# Altium PCB PCB5.pcbdoc
Units mil, origin at the board's own origin, x right, y up, seen from the top; angles counter-clockwise.
Board outline 4640 x 4130.45 mil, 2 copper layers (Top Layer, Bottom Layer); 22 components, 48 nets, 149 pads, 54 vias.
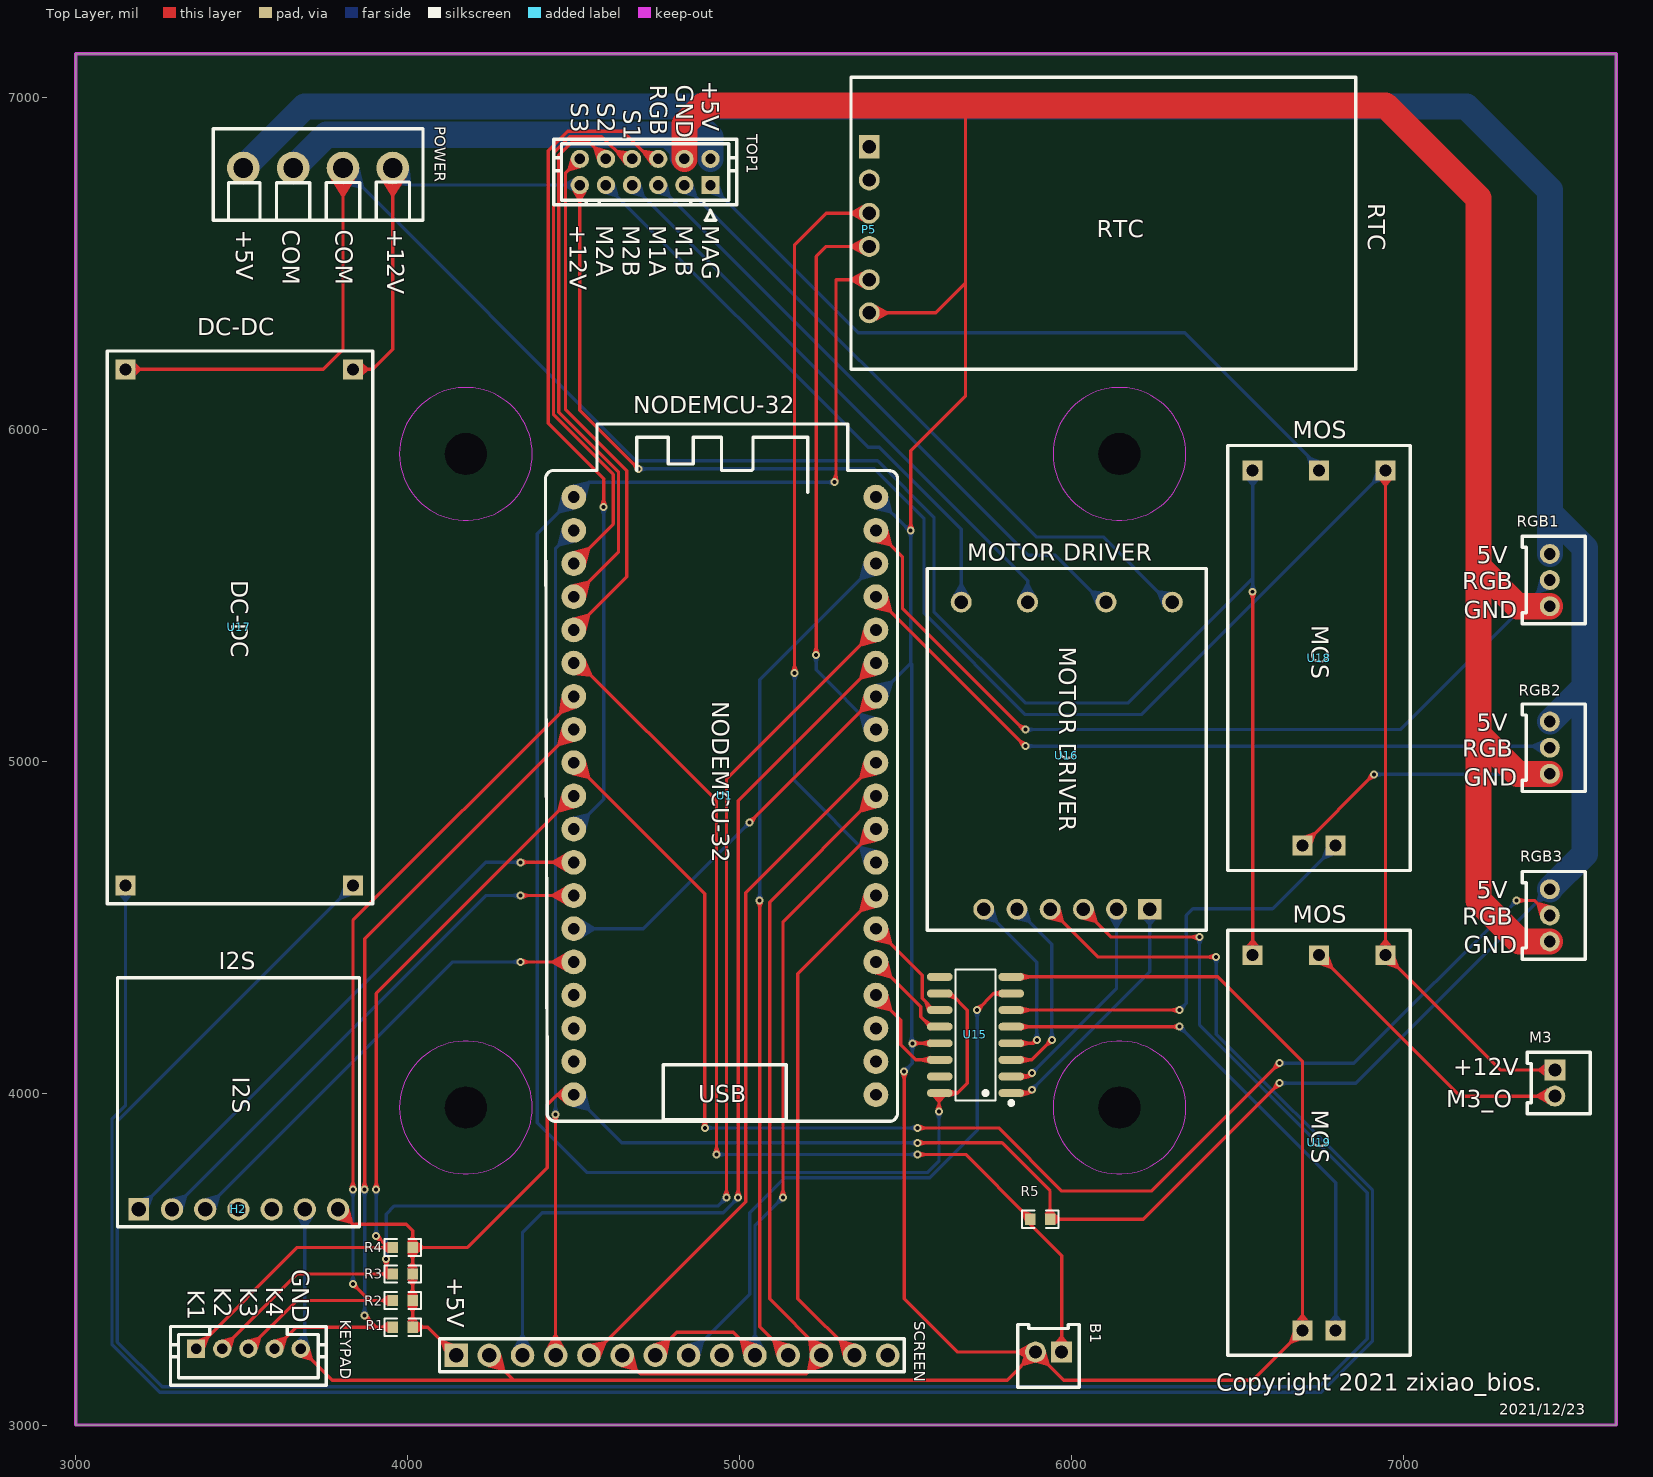
[diagram p0: Top Layer view]
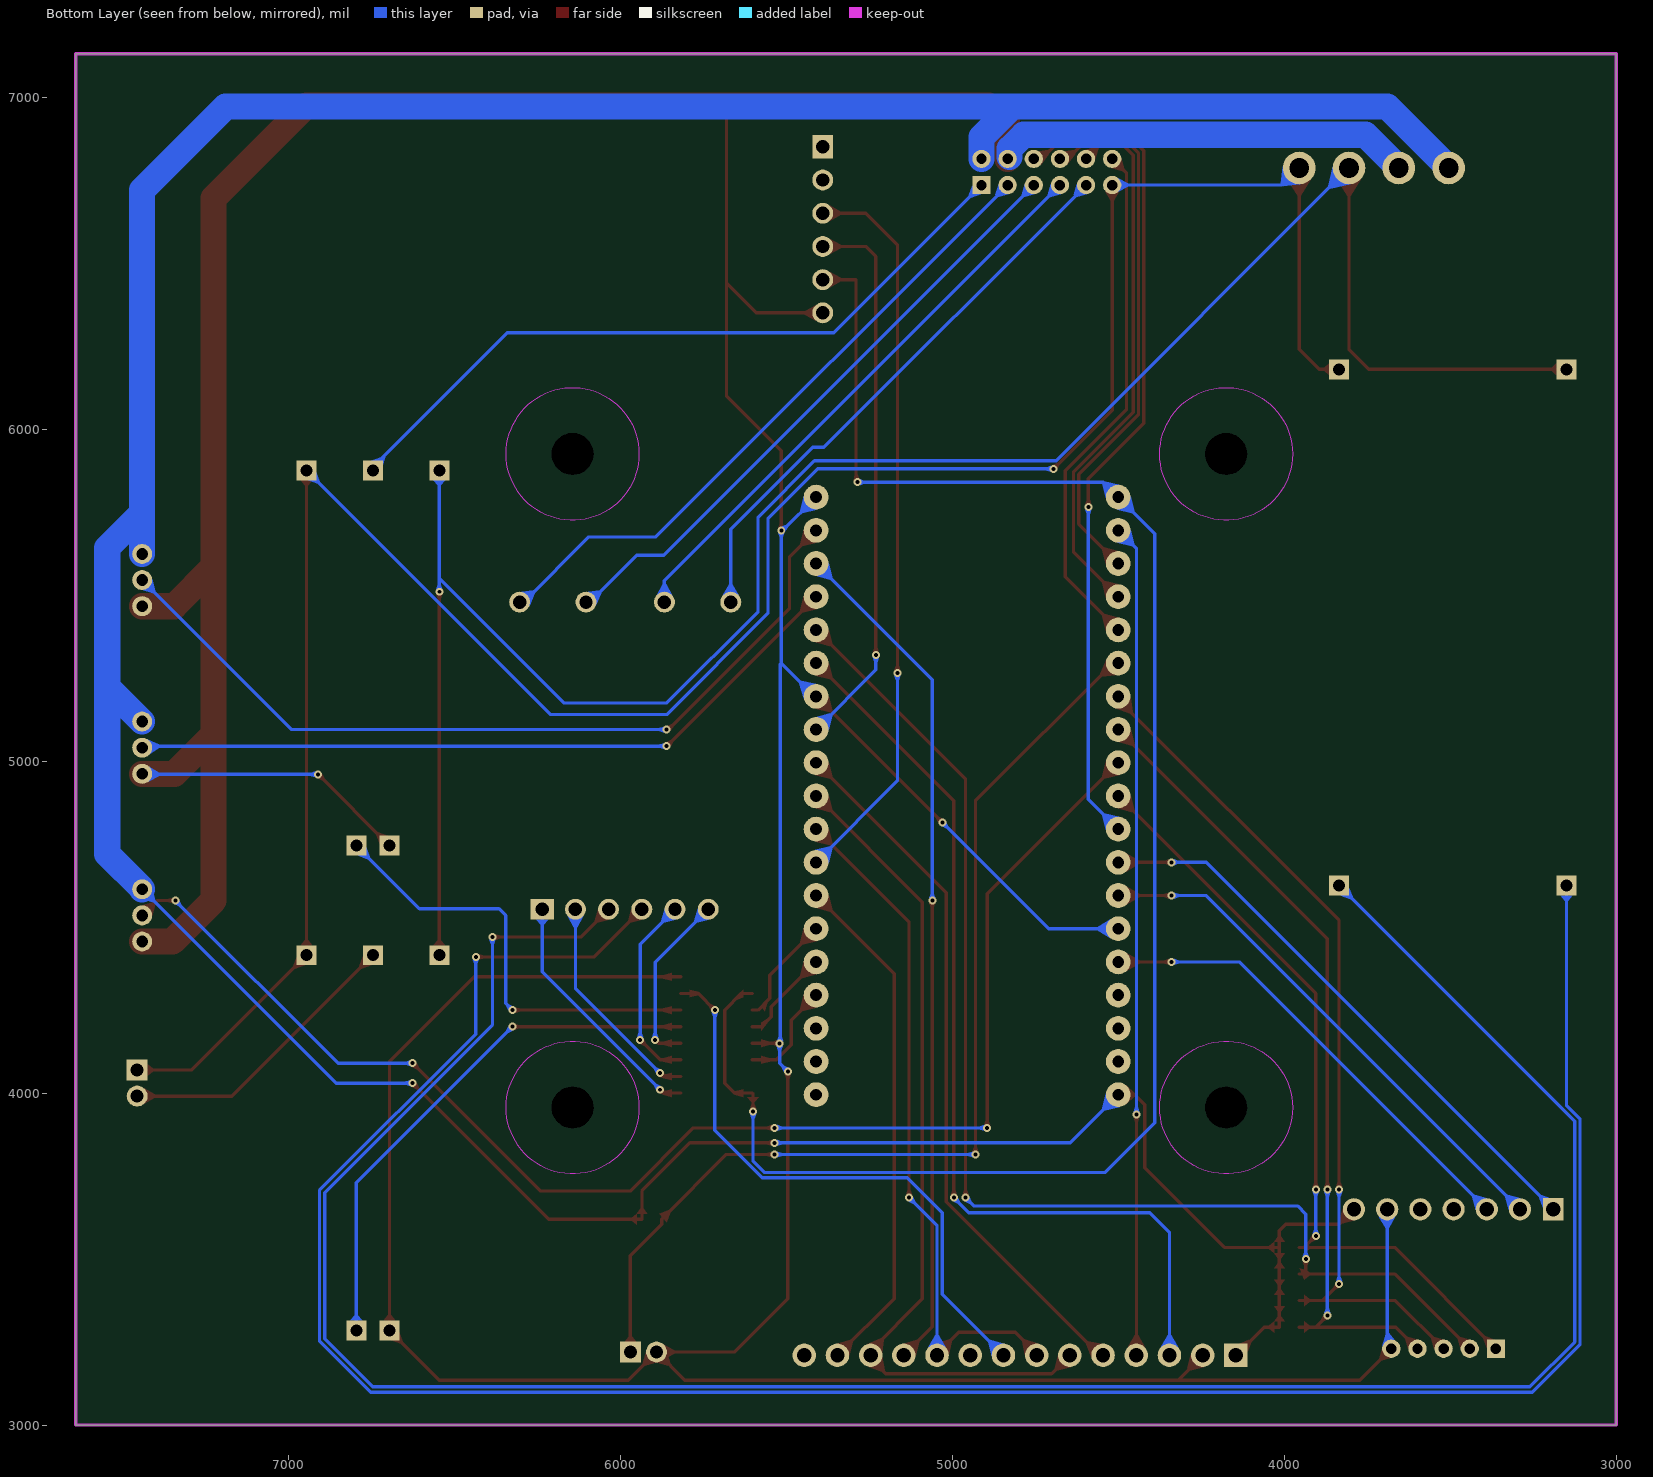
[diagram p1: Bottom Layer view, seen from below]

## Layer stack, top to bottom
Top Layer: signal copper (thickness not stored)
Dielectric: dielectric 12.6, FR-4, Dk 4.8
Bottom Layer: signal copper (thickness not stored)

## Board outline
3000,3000 7640,3000 7640,7130.45 3000,7130.45
cut-out: 6206.5,5925 ccw(c6143.5,5925) 6080.5,5925 ccw(c6143.5,5925)
cut-out: 4238,3956.5 ccw(c4175,3956.5) 4112,3956.5 ccw(c4175,3956.5)
cut-out: 6206.5,3956.5 ccw(c6143.5,3956.5) 6080.5,3956.5 ccw(c6143.5,3956.5)
cut-out: 4238,5925 ccw(c4175,5925) 4112,5925 ccw(c4175,5925)

## Components (designator, comment, footprint, x,y, rotation, side; value= is the part's Value field where it differs from the comment)
B1 "按钮" CONN-TH_2P-P2.00_PH-2A_C2319_2 5930,3220.22 r0 top
H2 "I2S功放" HDR-TH_7P-P2.54-V-F 3490,3650 r0 top
KEYPAD "摇杆" CONN-TH_5P-P2.00_PH-5A 3520,3230 r0 top
M3 "底盘电机" CONN-TH_2P-P2.00_PH-2A_C2319_1 7455.05,4030.22 r90 top
P5 "RTC模块" HDR-TH_6P-P2.54-V-F_1 5390,6600 r270 top
POWER "开关电源接线柱" CONN-TH_DB125-3.81-4P_1 3730,6786.42 r0 top
R1 "RC0603FR-0710KL" R0603 3985,3295 r0 top
R2 "RC0603FR-0710KL" R0603 3985,3375 r0 top
R3 "RC0603FR-0710KL" R0603 3985,3455 r0 top
R4 "RC0603FR-0710KL" R0603 3985,3535 r0 top
R5 "RC0603FR-0710KL" R0603 5905,3620 r0 top
RGB1 "RGB1" CONN-TH_12P-P2.00-H-W4.8_PH-3A 7440,5545.22 r0 top
RGB2 "RGB2" CONN-TH_12P-P2.00-H-W4.8_PH-3A 7440,5040.22 r0 top
RGB3 "RGB3" CONN-TH_12P-P2.00-H-W4.8_PH-3A 7440,4535.22 r0 top
SCREEN "TFT屏幕" HDR-TH_14P-P2.54-V-M_1 4795.75,3210.22 r0 top
TOP1 "顶盖" CONN-TH_12P-P2.00_PHD-2X6P 4715,6774.32 r0 top
U1 "NodeMCU-32S" ESP32S2-12K_2 4500,5795 r0 top
U15 "74HC595D" SOIC-16_L9.9-W3.9-P1.27-LS6.0-BL 5710,4175 r90 top
U16 "双路电机驱动模块" 双路电机驱动模块_1 5985,4500 r90 top
U17 "DC-DC降压模块" DC-DC降压模块 3870,6215 r270 top
U18 "MOS管驱动模块" MOS管模块_1 6745,5875.22 r270 top
U19 "MOS管驱动模块" MOS管模块_1 6745,4415.22 r270 top

## Footprints (in the part's own frame and the unit in brackets; to place one, negate y for a bottom-side part, rotate by r counter-clockwise, add the part's x,y. Pads: shape width x height; smd on the part's side, far side on the other; paste and mask are expansions set on the pad)
CONN-TH_2P-P2.00_PH-2A_C2319_1 [mil]
  rect 63x63 hole 39.4: 1(39.4,0)
  round 63 hole 39.4: 2(-39.4,0)
  silkscreen extent -92,-106 92,83
CONN-TH_2P-P2.00_PH-2A_C2319_2 [mil]
  rect 63x63 hole 39.4: 1(39.4,0)
  round 63 hole 39.4: 2(-39.4,0)
  silkscreen extent -92,-106 92,83
CONN-TH_5P-P2.00_PH-5A [mil]
  rect 55.1x55.1 hole 31.5: 1(-157.5,0)
  round 55.1 hole 31.5: 2(-78.7,0) 3(0,0) 4(78.7,0) 5(157.5,0)
  silkscreen extent -235,-110 235,67
CONN-TH_12P-P2.00-H-W4.8_PH-3A [mil]
  round 60 hole 35.4: 1(0,78.7) 2(0,0) 3(0,-78.7)
  silkscreen extent -83,-132 106,132
CONN-TH_12P-P2.00_PHD-2X6P [mil]
  rect 55.1x55.1 hole 31.5: 1(196.9,-39.4)
  round 55.1 hole 31.5: 2(118.1,-39.4) 3(39.4,-39.4) 4(-39.4,-39.4) 5(-118.1,-39.4) 6(-196.8,-39.4) 7(196.9,39.4) 8(118.1,39.4) 9(39.4,39.4) 10(-39.4,39.4) 11(-118.1,39.4) 12(-196.8,39.4)
  silkscreen extent -276,-146 276,98
CONN-TH_DB125-3.81-4P_1 [mil]
  round 98.4 hole 59.1: 1(-225,0) 2(-75,0) 3(75,0) 4(225,0)
  silkscreen extent -316,-158 316,118
DC-DC降压模块 [mil]
  rect 60x60 hole 36: 1(35,-35) 2(35,-720) 3(1590,-35) 4(1590,-720)
  silkscreen extent -20,-775 1645,25
ESP32S2-12K_2 [mm]
  round 1.9 hole 0.914: 1(0,0) 2(0,-2.54) 3(0,-5.08) 4(0,-7.62) 5(0,-10.16) 6(0,-12.7) 7(0,-15.24) 8(0,-17.78) 9(0,-20.32) 10(0,-22.86) 11(0,-25.4) 12(0,-27.94) 13(0,-30.48) 14(0,-33.02) 15(0,-35.56) 16(0,-38.1) 17(0,-40.64) 18(0,-43.18) 19(0,-45.72) 20(23.114,-45.72) 21(23.114,-43.18) 22(23.114,-40.64) 23(23.114,-38.1) 24(23.114,-35.56) 25(23.114,-33.02) 26(23.114,-30.48) 27(23.114,-27.94) 28(23.114,-25.4) 29(23.114,-22.86) 30(23.114,-20.32) 31(23.114,-17.78) 32(23.114,-15.24) 33(23.114,-12.7) 34(23.114,-10.16) 35(23.114,-7.62) 36(23.114,-5.08) 37(23.114,-2.54) 38(23.114,0)
  silkscreen extent -2.17,-47.76 24.77,5.59
HDR-TH_6P-P2.54-V-F_1 [mil]
  rect 70.9x63 hole 40.2: 1(-250,0)
  round 63 hole 40.2: 2(-150,0) 3(-50,0) 4(50,0) 5(150,0) 6(250,0)
  silkscreen extent -460,-55 420,1465
HDR-TH_7P-P2.54-V-F [mil]
  rect 62x66.9 hole 43.3: 1(-300,0)
  round 66.9 hole 43.3: 2(-200,0) 3(-100,0) 4(0,0) 5(100,0) 6(200,0) 7(300,0)
  silkscreen extent -364,-52 364,697
HDR-TH_14P-P2.54-V-M_1 [mil]
  rect 70.9x70.9 hole 43.3: 1(-650,0)
  round 70.9 hole 43.3: 2(-550,0) 3(-450,0) 4(-350,0) 5(-250,0) 6(-150,0) 7(-50,0) 8(50,0) 9(150,0) 10(250,0) 11(350,0) 12(450,0) 13(550,0) 14(650,0)
  silkscreen extent -700,-50 700,50
MOS管模块_1 [mil]
  rect 60x60 hole 36: 1(0,200) 2(0,0) 3(0,-200) 4(1130,50) 5(1130,-50)
  silkscreen extent -75,-275 1205,275
R0603 [mil]
  rect 31.8x34 smd: 1(-29.7,0) 2(29.7,0)
  silkscreen extent -54,-26 54,26
SOIC-16_L9.9-W3.9-P1.27-LS6.0-BL [mil]
  oval 23.7x77.6 smd: 1(-175,-107.7) 2(-125,-107.7) 3(-75,-107.7) 4(-25,-107.7) 5(25,-107.7) 6(75,-107.7) 7(125,-107.7) 8(175,-107.7) 9(175,107.7) 10(125,107.7) 11(75,107.7) 12(25,107.7) 13(-25,107.7) 14(-75,107.7) 15(-125,107.7) 16(-175,107.7)
  silkscreen extent -211,-114 198,60
双路电机驱动模块_1 [mil]
  rect 63x70.9 hole 40.2: 1(53.7,-250)
  round 63 hole 40.2: 2(53.7,-150) 3(53.7,-50) 4(53.7,50) 5(53.7,150) 6(53.7,250) 7(978.7,318) 8(978.7,118) 9(978.7,-118) 10(978.7,-318)
  silkscreen extent -10,-420 1080,420

## Via types
v1: diameter 24.02, hole 12.01, Top Layer to Bottom Layer, 54 vias

## Nets (pads, with @x,y where several pads share a name; then routed paths per layer and width w, separated by ;. In a path a pad name is that pad's centre, name@x,y a point inside that pad or via, vN(x,y) a via of type N, cw(c..) or ccw(c..) an arc to the next point about the centre after c; other vN are vias at no path point)
+3.3V: P5.5 U1.1 U15.10 U15.16 | length 5356.6
  Top Layer w10: v1(5285,5840) 5290,5845 5290,6450 P5.5 ; v1(5600,3945) 5600,3997.7 U15.16 5655,4000 5685,4030 5685,4250 5635,4300 U15.10
  Bottom Layer w10: v1(5285,5840) 4545,5840 U1.1 4390,5685 4390,3910 4539,3761 5566,3761 5600,3795 v1(5600,3945)
+5V: H2.7 POWER.1 R1.2 R2.2 R3.2 R4.2 R5.2 RGB1.1 RGB2.1 RGB3.1 SCREEN.1 TOP1.7 U1.19 | length 11828.3
  Top Layer w10: H2.7 3835,3605 3995,3605 4014.7,3585.3 R4.2 ; SCREEN.1 4060.97,3295 R1.2 R2.2 R3.2 R4.2 ; U1.19 4450,3995 4420,3965 4420,3775 4180,3535 R4.2 ; v1(5535,3850) 5790,3850 5934.7,3705.3 R5.2 6215,3620 v1(6625,4030)
  Bottom Layer w10: U1.19 4645,3850 v1(5535,3850) ; v1(6625,4030) 6856.08,4030 RGB3.1
  Bottom Layer w78.74: v1(3505,6786.42) 3689.96,6971.38 4819.7,6971.38 ; TOP1.7 4911.9,6879.19 4819.7,6971.38 ; RGB3.1 7440,4615 7545,4720 7545,5223.92 ; RGB2.1 7545,5223.92 ; RGB1.1 7440,5747.01 ; 4819.7,6971.38 7188.62,6971.38 7440,6720 7440,5747.01 ; 7440,5747.01 7545,5642.01 7545,5223.92
+6V: U16.3 U17.3 | length 7353.9
  Top Layer w10: U16.3 6118.7,4470 v1(6385,4470)
  Bottom Layer w10: U17.3 3125,3915 3125,3250 3260,3115 6745,3115 6890,3260 6890,3700 6385,4205 v1(6385,4470)
+12V: M3.1 POWER.4 TOP1.6 U17.1 U18.1 U19.1 | length 7345.2
  Top Layer w10: U17.1 3895,6180 3955,6240 v1(3955,6786.42) ; TOP1.6 4518.2,6056.8 v1(4695,5880) ; U18.1 U19.1 7290.6,4069.62 M3.1
  Bottom Layer w10: v1(3955,6786.42) 4006.5,6734.92 TOP1.6 ; v1(4695,5880) 5405,5880 5555,5730 5555,5445 5860,5140 6209.78,5140 U18.1
B1: B1.1 R5.1 U1.6 | length 3116.7
  Top Layer w10: U1.6@4515,5295 4930,4880 v1(4930,3815) ; v1(5535,3815) 5680.3,3815 R5.1 5875.3,3604.7 5969.4,3510.6 B1.1
  Bottom Layer w10: v1(4930,3815) v1(5535,3815)
GND: B1.2 H2.6 KEYPAD.5 P5.6 POWER.2 RGB1.3 RGB2.3 RGB3.3 SCREEN.2 TOP1.8 U1.14 U1.32 U1.38 U15.8 U15.13 U18.5 U19.5 | length 19189
  Top Layer w10: KEYPAD.5 3772.5,3135 4320,3135 ; SCREEN.2 4245.75,3209.25 4320,3135 ; v1(5030,4815) U1.32 ; P5.6 5590,6350 5680,6440 ; v1(5495,4065) 5495,3380 5654.78,3220.22 B1.2 ; v1(5515,5695) 5515,5935 5680,6100 5680,6440 ; v1(5520,4150) U15.13 ; 5681.26,6975 5680,6973.74 5680,6440 ; U15.8 6440,4350 6695,4095 U19.5 6544.78,3135 5975.82,3135 B1.2 ; U18.5 6909.78,4960 v1(6910,4960) ; 4320,3135 5805.38,3135 B1.2
  Top Layer w78.74: TOP1.8 4833.1,6918.1 4890,6975 5681.26,6975 6945,6975 7225,6695 7225,5585 ; RGB3.3 7348.48,4456.52 7225,4580 7225,5078.89 ; RGB2.3 7342.36,4961.52 7225,5078.89 ; RGB1.3 7343.48,5466.52 7225,5585 ; 7225,5078.89 7225,5585
  Bottom Layer w10: KEYPAD.5 3690,3242.5 H2.6 ; U1.14 4710,4495 v1(5030,4815) ; U1.32 5415,5195 5515,5295 ; U1.38 5510,5695 v1(5515,5695) 5515,5295 ; v1(5495,4065) 5520,4090 v1(5520,4150) 5517.81,4152.19 5517.81,5292.19 5515,5295 ; v1(6910,4960) 7438.48,4960 RGB2.3
  Bottom Layer w78.74: POWER.2 3755.22,6886.64 4784.6,6886.64 4827.14,6844.11 TOP1.8@4827.14,6819.69
GND6V: U16.4 U17.4 | length 7230.6
  Top Layer w10: U16.4 6078.7,4410 v1(6435,4410)
  Bottom Layer w10: U17.4 3150,3962.63 3109,3921.63 3109,3243.37 3253.37,3099 6751.63,3099 6906,3253.37 6906,3706.63 6435,4177.63 v1(6435,4410)
GND12V: POWER.3 U17.2 U18.3 U19.3 | length 6416
  Top Layer w10: U17.2 3745,6180 3805,6240 v1(3805,6786.42) ; U19.3 v1(6545,5510)
  Bottom Layer w10: v1(3805,6786.42) 4686.42,5905 5415,5905 5585,5735 5585,5450 5860,5175 6170,5175 6545,5550 ; v1(6545,5510) 6545,5550 ; U18.3 6545,5550
I2S_BLCK: H2.2 U1.13 | length 1601.4
  Top Layer w10: v1(4340,4595) U1.13
  Bottom Layer w10: H2.2 4235,4595 v1(4340,4595)
I2S_DIN: H2.3 U1.15 | length 1418.6
  Top Layer w10: v1(4340,4395) U1.15
  Bottom Layer w10: H2.3 4135,4395 v1(4340,4395)
I2S_LRC: H2.1 U1.12 | length 1742.9
  Top Layer w10: v1(4340,4695) U1.12
  Bottom Layer w10: H2.1 4235,4695 v1(4340,4695)
K1: KEYPAD.1 R4.1 U1.10 | length 2340.1
  Top Layer w10: KEYPAD.1 3667.5,3535 R4.1@3940,3535 ; v1(3905,3570) R4.1@3940,3535 ; v1(3905,3710) 3905,4300 U1.10 ; R4.1 R4.1@3940,3535
  Bottom Layer w10: v1(3905,3570) v1(3905,3710)
K2: KEYPAD.2 R3.1 U1.34 | length 3733.4
  Top Layer w10: KEYPAD.2 3666.3,3455 R3.1@3945,3455 ; v1(3935,3500) 3935,3465 R3.1@3945,3455 ; R3.1 R3.1@3945,3455 ; v1(4960,3685) 4960,4945 U1.34
  Bottom Layer w10: v1(3935,3500) 3935,3635 3960,3660 4935,3660 v1(4960,3685)
K3: KEYPAD.3 R2.1 U1.7 | length 2611.5
  Top Layer w10: KEYPAD.3 3665,3375 3885,3375 ; v1(3835,3425) 3885,3375 ; v1(3835,3710) 3835,4520 4500,5185 U1.7 ; R2.1 3885,3375
  Bottom Layer w10: v1(3835,3425) v1(3835,3710)
K4: KEYPAD.4 R1.1 U1.8 | length 2459
  Top Layer w10: KEYPAD.4 3663.7,3295 3905,3295 ; v1(3870,3330) 3905,3295 ; v1(3870,3710) 3870,4465 U1.8 ; R1.1 3905,3295
  Bottom Layer w10: v1(3870,3330) v1(3870,3710)
M1A: U15.2 U16.2 | length 665.8
  Top Layer w10: U15.2 5870,4050 v1(5880,4060)
  Bottom Layer w10: v1(5880,4060) 6135,4315 U16.2
M1B: U15.1 U16.1 | length 757.2
  Top Layer w10: U15.1 5870,4000 v1(5880,4010)
  Bottom Layer w10: v1(5880,4010) 6235,4365 U16.1
M1OA: TOP1.3 U16.9 | length 1868.9
  Bottom Layer w10: TOP1.3 5869.32,5620 5950,5620 6091.3,5478.7 U16.9
M1OB: TOP1.2 U16.10 | length 1990.2
  Bottom Layer w10: TOP1.2 5893.02,5675 6095,5675 6291.3,5478.7 U16.10
M2A: U15.4 U16.6 | length 541.4
  Top Layer w10: U15.4 5885,4150 v1(5895,4160)
  Bottom Layer w10: U16.6 5895,4393.7 v1(5895,4160)
M2B: U15.3 U16.5 | length 584.3
  Top Layer w10: U15.3 5880,4100 v1(5940,4160)
  Bottom Layer w10: U16.5 5940,4448.7 v1(5940,4160)
M2OA: TOP1.5 U16.7 | length 1718.9
  Bottom Layer w10: TOP1.5 5386.82,5945 5420,5945 5667,5698 U16.7
M2OB: TOP1.4 U16.8 | length 1749.7
  Bottom Layer w10: TOP1.4 5867,5543.52 U16.8
M3: U15.5 U19.4 | length 1616.8
  Top Layer w10: U15.5 v1(6325,4200)
  Bottom Layer w10: v1(6325,4200) 6795,3730 U19.4
M3_O: M3.2 U19.2 | length 885.8
  Top Layer w10: U19.2 7169.4,3990.82 M3.2
MAG: U15.6 U18.4 | length 1337.7
  Top Layer w10: U15.6 v1(6325,4250)
  Bottom Layer w10: v1(6325,4250) 6345,4270 6345,4535 6365,4555 6604.78,4555 U18.4
MAG_O: TOP1.1 U18.2 | length 2194.9
  Bottom Layer w10: TOP1.1 5356.82,6290 6340,6290 6745,5885 U18.2
RCK: U1.24 U15.12 | length 290.6
  Top Layer w10: U1.24 5545,4260 5545,4230 5575,4200 U15.12
RESET: SCREEN.4 U1.2 | length 2507.9
  Top Layer w10: v1(4445,3935) 4445,3210.97 SCREEN.4
  Bottom Layer w10: v1(4445,3935) 4445,5640 U1.2
RGB1: RGB1.2 U1.37 | length 2555.8
  Top Layer w10: U1.37 5490,5615 5490,5460 5855,5095 v1(5860,5095)
  Bottom Layer w10: v1(5860,5095) 6989.78,5095 RGB1.2
RGB2: RGB2.2 U1.35 | length 2218.4
  Top Layer w10: U1.35 v1(5860,5045)
  Bottom Layer w10: v1(5860,5045) 7435.22,5045 RGB2.2
RGB3: RGB3.2 U1.9 | length 4268.3
  Top Layer w10: U1.9 4895,4600 v1(4895,3895) ; v1(5535,3895) 5780,3895 5970,3705 6240,3705 v1(6625,4090) ; v1(7340,4580) 7395.22,4580 RGB3.2
  Bottom Layer w10: v1(4895,3895) v1(5535,3895) ; v1(6625,4090) 6850,4090 v1(7340,4580)
RGB4: TOP1.9 U1.11 | length 2539.9
  Top Layer w10: v1(4590,5765) 4590,5850 4423,6017 4423,6838.25 4481.75,6897 4646.84,6897 4730.12,6813.72 TOP1.9
  Bottom Layer w10: U1.11 4590,4885 v1(4590,5765)
RTC_SCL: P5.3 U1.27 | length 2225.8
  Top Layer w10: v1(5165,5265) 5165,6555 5260,6650 P5.3
  Bottom Layer w10: v1(5165,5265) 5165,4940 U1.27
RTC_SDA: P5.4 U1.31 | length 1672
  Top Layer w10: v1(5230,5320) 5230,6520 5260,6550 P5.4
  Bottom Layer w10: v1(5230,5320) 5230,5275 U1.31
S1: TOP1.10 U1.3 | length 1645.4
  Top Layer w10: U1.3 4619,5714 4619,5863.37 4439,6043.37 4439,6831.63 4488.37,6881 4584.14,6881 4651.42,6813.72 v1(4675.6,6813.72)
S2: TOP1.11 U1.4 | length 1640.2
  Top Layer w10: U1.4 4635,5630 4635,5870 4455,6050 4455,6825 4495,6865 4545.62,6865 v1(4596.9,6813.72)
  other v1: 4596.9,6813.72
S3: TOP1.12 U1.5 | length 1579.5
  Top Layer w10: U1.5 4660,5555 4660,5875 4475,6060 4475,6770.52 v1(4518.2,6813.72)
  other v1: 4518.2,6813.72
SCK: U1.25 U15.11 | length 334.8
  Top Layer w10: U1.25 5550,4355 5550,4285 5585,4250 U15.11
SI: U1.23 U15.14 | length 317
  Top Layer w10: U1.23 5485,4220 5485,4145 5530,4100 U15.14
TFT_CS: SCREEN.3 U1.33 | length 2844.9
  Top Layer w10: v1(4995,3685) 4995,4880 U1.33
  Bottom Layer w10: SCREEN.3 4345.75,3580.75 4405,3640 4950,3640 v1(4995,3685)
TFT_DC: SCREEN.5 U1.30 | length 2148.3
  Top Layer w10: SCREEN.5 4555.22,3210.22 5018.01,3673.01 5018.01,4603.01 U1.30
TFT_LED: SCREEN.8 U15.7 | length 1779.6
  Top Layer w10: v1(5715,4250) 5765,4300 U15.7
  Bottom Layer w10: SCREEN.8 5029.75,3394.22 5029.75,3639.75 5135,3745 5572.63,3745 5715,3887.37 v1(5715,4250)
TFT_MISO: SCREEN.13 U1.26 | length 1552.8
  Top Layer w10: SCREEN.13 5175,3380.97 5175,4360 U1.26
TFT_MOSI: SCREEN.6 SCREEN.12 U1.29 | length 2533.1
  Top Layer w10: SCREEN.6 4700.97,3155 5200,3155 5245.75,3200.75 5245.75,3224.25 5090,3380 5090,4575 U1.29
TFT_SCLK: SCREEN.7 SCREEN.10 U1.28 | length 2099.1
  Top Layer w10: SCREEN.7 4745.75,3215.75 4810,3280 4980,3280 5045.75,3214.25 SCREEN.10 ; v1(5130,3685) 5130,4515 U1.28
  Bottom Layer w10: SCREEN.10 5045.75,3600.75 v1(5130,3685)
TOUCH_CS: SCREEN.11 U1.36 | length 2565.3
  Top Layer w10: v1(5060,4580) 5060,3295.97 SCREEN.11
  Bottom Layer w10: v1(5060,4580) 5060,5245 U1.36
"": H2.4 H2.5 P5.1 P5.2 SCREEN.9 SCREEN.14 U1.16 U1.17 U1.18 U1.20 U1.21 U1.22 U15.9 U15.15

## Keep-outs
Board Outline Layer:
  the board outline again, w10
Multi-Layer:
  region net "": 4375,5925 ccw(c4175,5925) 3975,5925 ccw(c4175,5925)
  region net "": 6343.5,5925 ccw(c6143.5,5925) 5943.5,5925 ccw(c6143.5,5925)
  region net "": 4375,3956.5 ccw(c4175,3956.5) 3975,3956.5 ccw(c4175,3956.5)
  region net "": 6343.5,3956.5 ccw(c6143.5,3956.5) 5943.5,3956.5 ccw(c6143.5,3956.5)

## Other copper
Top Layer:
  region net +5V: 4045.6,3290 4045.6,3300 4030.6,3312 4030.6,3278
  region net +5V: 4009.7,3327 3998.8,3312 4030.6,3312 4019.7,3327
  region net K4: 3924.4,3300 3924.4,3290 3939.4,3278 3939.4,3312
  region net +5V: 4009.7,3407 3998.8,3392 4030.6,3392 4019.7,3407
  region net +5V: 4009.7,3343 4019.7,3343 4030.6,3358 3998.8,3358
  region net K3: 3924.4,3380 3924.4,3370 3939.4,3358 3939.4,3392
  region net +5V: 4009.7,3487 3998.8,3472 4030.6,3472 4019.7,3487
  region net +5V: 4009.7,3423 4019.7,3423 4030.6,3438 3998.8,3438
  region net K2: 3938.54,3468.54 3931.46,3461.46 3939.4,3438 3952.75,3472
  region net K2: 3924.4,3460 3924.4,3450 3939.4,3438 3939.4,3472
  region net +5V: 4009.7,3503 4019.7,3503 4030.6,3518 3998.8,3518
  region net +5V: 4045.6,3540 4030.6,3552 4030.6,3518 4045.6,3530
  region net +5V: 4019.7,3567 4009.7,3567 3998.8,3552 4030.6,3552
  region net K1: 3924.4,3540 3924.4,3530 3939.4,3518 3939.4,3552
  region net +5V: 5939.7,3652 5929.7,3652 5918.8,3637 5950.6,3637
  region net +5V: 5965.6,3615 5965.6,3625 5950.6,3637 5950.6,3603
  region net B1: 5854.76,3647.61 5848.79,3639.44 5859.4,3611.15 5883.05,3637
  region net M1B: 5870,4005 5844.65,4011.85 5844.65,3988.15 5870,3995
  region net M1A: 5870,4045 5870,4055 5844.65,4061.85 5844.65,4038.15
  region net M2B: 5870.39,4095 5870.39,4105 5844.65,4111.85 5844.65,4088.15
  region net M2A: 5870.39,4145 5870.39,4155 5844.65,4161.85 5844.65,4138.15
  region net M3: 5870.39,4205 5844.65,4211.85 5844.65,4188.15 5870.39,4195
  region net MAG: 5870.39,4255 5844.65,4261.85 5844.65,4238.15 5870.39,4245
  region net TFT_LED: 5765.01,4305 5765.01,4295 5790.75,4288.15 5790.75,4311.85
  region net GND: 5870.39,4355 5844.65,4361.85 5844.65,4338.15 5870.39,4345
  region net +3.3V: 5595,3973.15 5605,3973.15 5617.5,3988.15 5582.5,3988.15
  region net +3.3V: 5654.99,4005 5629.25,4011.85 5629.25,3988.15 5654.99,3995
  region net SI: 5549.61,4105 5549.61,4095 5575.35,4088.15 5575.35,4111.85
  region net GND: 5549.61,4155 5549.61,4145 5575.35,4138.15 5575.35,4161.85
  region net RCK: 5560.43,4221.64 5553.52,4214.41 5575.35,4188.15 5575.35,4211.85
  region net SCK: 5569.61,4272.46 5557.75,4270.18 5564.16,4246.09 5575.35,4261.85
  region net +3.3V: 5647.55,4280.38 5651.66,4290.41 5629.25,4311.85 5629.25,4288.15
  region net +12V: 3880,6175 3880,6185 3865,6197.5 3865,6162.5
  region net GND12V: 3195,6175 3195,6185 3180,6197.5 3180,6162.5
  region net +5V: 3787.91,3616.62 3826.67,3606.25 3833.75,3613.33 3823.38,3652.09
  region net RGB3: 7441.88,4565.16 7407.47,4574.82 7400.4,4567.75 7410.06,4533.34
  region net GND: 3675.77,3202.5 3707.08,3193.35 3714.15,3200.42 3705,3231.73
  region net K4: 3626.2,3228.27 3635.35,3259.58 3628.28,3266.65 3596.97,3257.5
  region net K3: 3547.5,3228.27 3556.65,3259.58 3549.58,3266.65 3518.27,3257.5
  region net K2: 3468.8,3228.27 3477.95,3259.58 3470.88,3266.65 3439.57,3257.5
  region net K1: 3393.59,3268.16 3365.3,3257.55 3390.05,3232.8 3400.66,3261.09
  region net +12V: 7408.55,4074.62 7408.55,4064.62 7423.55,4052.12 7423.55,4087.12
  region net M3_O: 7434.21,4014.45 7401.5,3995.82 7401.5,3985.82 7434.21,3967.2
  region net M3_O: 6785.61,4381.69 6775,4409.97 6750.25,4385.22 6778.54,4374.62
  region net GND12V: 6540,4460.22 6527.5,4445.22 6562.5,4445.22 6550,4460.22
  region net +12V: 6950,4460.22 6940,4460.22 6927.5,4445.22 6962.5,4445.22
  region net +12V: 6985.61,4381.69 6975,4409.97 6950.25,4385.22 6978.54,4374.62
  region net GND: 6661.46,3244.62 6689.75,3255.22 6665,3279.97 6654.39,3251.69
  region net GND: 6700,3330.22 6690,3330.22 6677.5,3315.22 6712.5,3315.22
  region net +12V: 6950,5830.22 6962.5,5845.22 6927.5,5845.22 6940,5830.22
  region net GND: 6728.54,4785.83 6700.25,4775.22 6725,4750.47 6735.61,4778.76
  region net GND: 5410.84,6326.38 5443.55,6345 5443.55,6355 5410.84,6373.62
  region net +3.3V: 5369.16,6473.62 5336.45,6455 5336.45,6445 5369.16,6426.38
  region net RTC_SDA: 5369.16,6573.62 5336.45,6555 5336.45,6545 5369.16,6526.38
  region net RTC_SCL: 5369.16,6673.62 5336.45,6655 5336.45,6645 5369.16,6626.38
  region net TFT_MISO: 5347.97,3245.6 5306.67,3256.37 5299.6,3249.3 5310.37,3208
  region net TFT_MOSI: 5210.59,3205.72 5203.79,3165.86 5212.22,3160.15 5254.62,3175.9
  region net TFT_MOSI: 5257.78,3243.57 5214.99,3262.08 5205.85,3257.07 5211.16,3217.99
  region net TOUCH_CS: 5147.97,3245.6 5106.67,3256.37 5099.6,3249.3 5110.37,3208
  region net TFT_SCLK: 5050.8,3245.31 5008.99,3258.08 5001.35,3251.58 5010.31,3210.85
  region net TFT_SCLK: 4781.16,3211.92 4789.48,3252.41 4781.63,3258.7 4739.64,3245.14
  region net TFT_MOSI: 4643.53,3174.84 4684.83,3164.07 4691.9,3171.15 4681.13,3212.44
  region net TFT_DC: 4580.07,3201.36 4595.83,3243.75 4590.12,3252.19 4550.26,3245.39
  region net RESET: 4471.84,3234.23 4450,3270.59 4440,3270.38 4418.67,3233.1
  region net GND: 4242.84,3174.89 4284.27,3163.66 4291.48,3170.59 4281.17,3211.76
  region net +5V: 4099.69,3249.21 4110.3,3220.92 4135.05,3245.67 4106.76,3256.28
  region net B1: 5974.4,3266.72 5964.4,3266.72 5951.9,3251.72 5986.9,3251.72
  region net GND: 5859.16,3222.2 5849.2,3185.89 5856.27,3178.82 5892.57,3188.79
  region net GND: 5869.76,3243.85 5837.05,3225.22 5837.05,3215.22 5869.76,3196.6
  region net GND: 5888.63,3188.79 5924.93,3178.82 5932,3185.89 5922.04,3222.2
  region net GND12V: 3768.1,6753.88 3800,6702.78 3810,6702.78 3841.9,6753.88
  region net +12V: 3918.1,6753.88 3950,6702.78 3960,6702.78 3991.9,6753.88
  region net S1: 4537.33,5592.66 4548.5,5636.42 4541.42,5643.5 4497.66,5632.33
  region net S2: 4537.33,5492.66 4548.5,5536.42 4541.42,5543.5 4497.66,5532.33
  region net S3: 4537.33,5392.66 4548.5,5436.42 4541.42,5443.5 4497.66,5432.33
  region net B1: 4508.34,5258.54 4549.68,5253.25 4554.66,5262.41 4535.13,5307.83
  region net K3: 4462.9,5190.24 4455.96,5148.03 4464.39,5142.32 4509.36,5158.79
  region net K4: 4462.67,5097.34 4451.5,5053.58 4458.58,5046.5 4502.34,5057.67
  region net RGB3: 4497.66,4957.67 4541.42,4946.5 4548.5,4953.58 4537.33,4997.34
  region net K1: 4462.67,4897.34 4451.5,4853.58 4458.58,4846.5 4502.34,4857.67
  region net I2S_LRC: 4475.26,4723.05 4436.42,4700 4436.42,4690 4475.26,4666.95
  region net I2S_BLCK: 4475.26,4623.05 4436.42,4600 4436.42,4590 4475.26,4566.95
  region net I2S_DIN: 4475.26,4423.05 4436.42,4400 4436.42,4390 4475.26,4366.95
  region net +5V: 4475.26,4023.05 4450,4000 4450,3990 4475.26,3966.95
  region net SI: 5407.66,4257.67 5451.42,4246.5 5458.5,4253.58 5447.33,4297.34
  region net RCK: 5407.66,4357.67 5451.42,4346.5 5458.5,4353.58 5447.33,4397.34
  region net SCK: 5407.66,4457.67 5451.42,4446.5 5458.5,4453.58 5447.33,4497.34
  region net TFT_MISO: 5372.67,4597.34 5361.5,4553.58 5368.58,4546.5 5412.34,4557.67
  region net TFT_SCLK: 5372.67,4797.34 5361.5,4753.58 5368.58,4746.5 5412.34,4757.67
  region net TFT_MOSI: 5372.67,4897.34 5361.5,4853.58 5368.58,4846.5 5412.34,4857.67
  region net TFT_DC: 5372.67,4997.34 5361.5,4953.58 5368.58,4946.5 5412.34,4957.67
  region net GND: 5372.67,5197.34 5361.5,5153.58 5368.58,5146.5 5412.34,5157.67
  region net TFT_CS: 5372.67,5297.34 5361.5,5253.58 5368.58,5246.5 5412.34,5257.67
  region net K2: 5372.67,5397.34 5361.5,5353.58 5368.58,5346.5 5412.34,5357.67
  region net RGB2: 5407.66,5457.67 5451.42,5446.5 5458.5,5453.58 5447.33,5497.34
  region net RGB1: 5407.66,5657.67 5451.42,5646.5 5458.5,5653.58 5447.33,5697.34
  region net GND6V: 5933.03,4522.26 5969.33,4512.3 5976.4,4519.37 5966.44,4555.67
  region net +6V: 6033.03,4522.26 6069.33,4512.3 6076.4,4519.37 6066.44,4555.67
  region net RGB4: 4738.61,6836.3 4710.31,6840.61 4708.87,6827.9 4733.97,6795.24
  region net S1: 4659.89,6836.35 4631.58,6840.63 4630.11,6827.96 4655.11,6795.3
  region net S2: 4598.63,6841.22 4567.32,6850.38 4560.25,6843.31 4569.4,6812
  region net +12V: 4497.54,6716.7 4513.2,6688.09 4523.2,6688.09 4538.86,6716.7
  region net S3: 4490.7,6815.45 4481.55,6784.14 4488.62,6777.07 4519.93,6786.23
  region net GND12V: 3795.99,6778.48 3800,6766.01 3810,6766.01 3814.01,6778.48
  region net +12V: 3945.99,6778.48 3950,6766.01 3960,6766.01 3964.01,6778.48
  region net S3: 4506.22,6814.48 4500.23,6802.82 4507.3,6795.75 4518.95,6801.74
  region net S3: 4506.22,6814.48 4500.23,6802.82 4507.3,6795.75 4518.95,6801.74
  region net S2: 4597.65,6825.71 4586,6831.69 4578.93,6824.62 4584.92,6812.97
  region net S2: 4597.65,6825.71 4586,6831.69 4578.93,6824.62 4584.92,6812.97
  region net S1: 4667.66,6822.73 4655.19,6818.72 4655.19,6808.72 4667.66,6804.72
  region net RGB4: 4599.01,5772.94 4595,5785.41 4585,5785.41 4580.99,5772.94
  region net +3.3V: 5609.01,3952.94 5605,3965.41 5595,3965.41 5590.99,3952.94
  region net RESET: 4435.99,3927.06 4440,3914.59 4450,3914.59 4454.01,3927.06
  region net M3: 6317.06,4209.01 6304.59,4205 6304.59,4195 6317.06,4190.99
  region net M1B: 5868.02,4010.75 5866.46,4003.54 5873.54,3996.46 5880.75,3998.02
  region net +5V: 6613.02,4030.75 6607.03,4019.1 6614.1,4012.03 6625.75,4018.02
  region net K3: 3844.01,3717.94 3840,3730.41 3830,3730.41 3825.99,3717.94
  region net K3: 3834.25,3413.02 3845.9,3407.03 3852.97,3414.1 3846.98,3425.75
  region net K4: 3879.01,3717.94 3875,3730.41 3865,3730.41 3860.99,3717.94
  region net K4: 3869.25,3318.02 3880.9,3312.03 3887.97,3319.1 3881.98,3330.75
  region net K2: 4969.01,3692.94 4965,3705.41 4955,3705.41 4950.99,3692.94
  region net K2: 3925.99,3492.06 3930,3479.59 3940,3479.59 3944.01,3492.06
  region net K1: 3914.01,3717.94 3910,3730.41 3900,3730.41 3895.99,3717.94
  region net K1: 3904.25,3558.02 3915.9,3552.03 3922.97,3559.1 3916.98,3570.75
  region net +5V: 5542.94,3840.99 5555.41,3845 5555.41,3855 5542.94,3859.01
  region net TFT_CS: 5004.01,3692.94 5000,3705.41 4990,3705.41 4985.99,3692.94
  region net TFT_SCLK: 5139.01,3692.94 5135,3705.41 5125,3705.41 5120.99,3692.94
  region net TOUCH_CS: 5050.99,4572.06 5055,4559.59 5065,4559.59 5069.01,4572.06
  region net TFT_LED: 5726.98,4249.25 5732.97,4260.9 5725.9,4267.97 5714.25,4261.98
  region net GND: 5041.98,4814.25 5047.97,4825.9 5040.9,4832.97 5029.25,4826.98
  region net GND: 5527.94,4140.99 5540.41,4145 5540.41,4155 5527.94,4159.01
  region net GND: 5485.99,4057.06 5490,4044.59 5500,4044.59 5504.01,4057.06
  region net RGB2: 5860.75,5056.98 5849.1,5062.97 5842.03,5055.9 5848.02,5044.25
  region net RGB1: 5857.19,5106.67 5845.61,5111.46 5840.72,5102.21 5848.77,5090.75
  region net GND: 6898.03,4960.91 6891.97,4949.26 6898.94,4942.1 6910.59,4948.01
  region net MAG: 6317.06,4259.01 6304.59,4255 6304.59,4245 6317.06,4240.99
  region net M1A: 5868.02,4060.75 5866.46,4053.54 5873.54,4046.46 5880.75,4048.02
  region net M2B: 5928.02,4160.75 5922.03,4149.1 5929.1,4142.03 5940.75,4148.02
  region net M2A: 5883.02,4160.75 5881.46,4153.54 5888.54,4146.46 5895.75,4148.02
  region net GND: 5524.01,5702.94 5520,5715.41 5510,5715.41 5505.99,5702.94
  region net RTC_SDA: 5239.01,5327.94 5235,5340.41 5225,5340.41 5220.99,5327.94
  region net RTC_SCL: 5174.01,5272.94 5170,5285.41 5160,5285.41 5155.99,5272.94
  region net +12V: 4695.75,5891.98 4684.1,5897.97 4677.03,5890.9 4683.02,5879.25
  region net GND12V: 6535.99,5502.06 6540,5489.59 6550,5489.59 6554.01,5502.06
  region net B1: 4939.01,3822.94 4935,3835.41 4925,3835.41 4920.99,3822.94
  region net B1: 5542.94,3805.99 5555.41,3810 5555.41,3820 5542.94,3824.01
  region net +3.3V: 5296.5,5843.47 5295,5857.87 5285,5862.45 5280.12,5850.97
  region net +3.3V: 5296.5,5843.47 5295,5857.87 5285,5862.45 5280.12,5850.97
  region net RGB3: 4904.01,3902.94 4900,3915.41 4890,3915.41 4885.99,3902.94
  region net RGB3: 5542.94,3885.99 5555.41,3890 5555.41,3900 5542.94,3904.01
  region net RGB3: 6613.02,4090.75 6607.03,4079.1 6614.1,4072.03 6625.75,4078.02
  region net RGB3: 7347.94,4570.99 7360.41,4575 7360.41,4585 7347.94,4589.01
  region net I2S_LRC: 4347.94,4685.99 4360.41,4690 4360.41,4700 4347.94,4704.01
  region net I2S_BLCK: 4347.94,4585.99 4360.41,4590 4360.41,4600 4347.94,4604.01
  region net I2S_DIN: 4347.94,4385.99 4360.41,4390 4360.41,4400 4347.94,4404.01
  region net +6V: 6377.06,4479.01 6364.59,4475 6364.59,4465 6377.06,4460.99
  region net GND6V: 6427.06,4419.01 6414.59,4415 6414.59,4405 6427.06,4400.99
Bottom Layer:
  region net +6V: 3801.46,4584.39 3829.75,4595 3805,4619.75 3794.39,4591.46
  region net GND6V: 3155,4580 3167.5,4595 3132.5,4595 3145,4580
  region net GND: 3664.91,3627.87 3685,3593.14 3695,3593.14 3715.09,3627.87
  region net I2S_DIN: 3423.38,3647.91 3433.75,3686.67 3426.67,3693.75 3387.91,3683.38
  region net I2S_BLCK: 3323.38,3647.91 3333.75,3686.67 3326.67,3693.75 3287.91,3683.38
  region net I2S_LRC: 3226.99,3694.06 3198.7,3683.45 3221,3656.25 3231.61,3684.54
  region net RGB1: 7410.06,5547.1 7400.4,5512.7 7407.47,5505.63 7441.88,5515.28
  region net RGB2: 7423.99,5065.6 7389.92,5050 7388.31,5040 7416.83,5021.17
  region net GND: 7419.04,4982.99 7388.76,4965 7389.27,4955 7421.32,4938.04
  region net +5V: 7410.06,4615.8 7400.4,4581.4 7407.47,4574.33 7441.88,4583.98
  region net GND: 3704.18,3236.86 3695,3273.65 3685,3278.74 3667.35,3255.61
  region net M3: 6800,3330.22 6790,3330.22 6777.5,3315.22 6812.5,3315.22
  region net MAG_O: 6721.24,5915.83 6707.1,5915.83 6715,5890.25 6749.53,5905.22
  region net GND12V: 6540,5830.22 6550,5830.22 6562.5,5845.22 6527.5,5845.22
  region net +12V: 6904.39,5841.69 6911.46,5834.62 6939.75,5845.22 6915,5869.97
  region net MAG: 6754.39,4711.69 6761.46,4704.62 6789.75,4715.22 6765,4739.97
  region net TFT_SCLK: 5072.34,3233.67 5050.75,3270.49 5040.75,3270.49 5019.16,3233.67
  region net TFT_LED: 4881.13,3208 4891.9,3249.3 4884.83,3256.37 4843.53,3245.6
  region net TFT_CS: 4372.34,3233.67 4350.75,3270.49 4340.75,3270.49 4319.16,3233.67
  region net GND12V: 3801.92,6737.32 3860.61,6723.75 3867.68,6730.82 3854.1,6789.5
  region net +12V: 3951.92,6737.32 4002.96,6731.39 4010.04,6738.46 4004.1,6789.5
  region net +3.3V: 4462.67,5797.34 4451.5,5753.58 4458.58,5746.5 4502.34,5757.67
  region net +3.3V: 4537.33,5792.66 4548.5,5836.42 4541.42,5843.5 4497.66,5832.33
  region net RESET: 4462.67,5697.34 4451.5,5653.58 4458.58,5646.5 4502.34,5657.67
  region net RGB4: 4537.33,4792.66 4548.5,4836.42 4541.42,4843.5 4497.66,4832.33
  region net GND: 4524.74,4466.95 4563.58,4490 4563.58,4500 4524.74,4523.05
  region net +5V: 4497.66,3957.67 4541.42,3946.5 4548.5,3953.58 4537.33,3997.34
  region net RTC_SCL: 5412.34,4732.33 5368.58,4743.5 5361.5,4736.42 5372.67,4692.66
  region net RTC_SDA: 5412.34,5132.33 5368.58,5143.5 5361.5,5136.42 5372.67,5092.66
  region net GND: 5446.94,5189.14 5460.62,5233.55 5454.22,5241.3 5411.2,5232.38
  region net TOUCH_CS: 5372.67,5597.34 5361.5,5553.58 5368.58,5546.5 5412.34,5557.67
  region net GND: 5407.66,5757.67 5451.42,5746.5 5458.5,5753.58 5447.33,5797.34
  region net M2A: 5733.03,4522.26 5769.33,4512.3 5776.4,4519.37 5766.44,4555.67
  region net M2B: 5833.03,4522.26 5869.33,4512.3 5876.4,4519.37 5866.44,4555.67
  region net M1A: 6111.38,4532.86 6130,4500.15 6140,4500.15 6158.62,4532.86
  region net M1B: 6230,4507.2 6240,4507.2 6252.5,4522.2 6217.5,4522.2
  region net M2OA: 5690.62,5499.54 5672,5532.25 5662,5532.25 5643.38,5499.54
  region net M1OA: 6096.65,5509.55 6062.07,5515 6056.93,5506 6073.18,5468.54
  region net M1OB: 6296.65,5509.55 6262.07,5515 6256.93,5506 6273.18,5468.54
  region net M2OB: 5890.62,5499.54 5872,5532.25 5862,5532.25 5843.38,5499.54
  region net MAG_O: 4950.06,6703.84 4939.45,6732.12 4914.7,6707.37 4942.99,6696.77
  region net M1OB: 4831.37,6707.43 4862.68,6698.27 4869.75,6705.34 4860.6,6736.65
  region net M1OA: 4752.67,6707.43 4783.98,6698.27 4791.05,6705.34 4781.9,6736.65
  region net M2OB: 4673.87,6707.43 4705.18,6698.27 4712.25,6705.34 4703.1,6736.65
  region net M2OA: 4595.17,6707.43 4626.48,6698.27 4633.55,6705.34 4624.4,6736.65
  region net +12V: 4499.98,6755.59 4471.36,6739.92 4471.36,6729.92 4499.98,6714.26
  region net GND12V: 3804.25,6774.44 3815.9,6768.45 3822.97,6775.52 3816.98,6787.18
  region net +12V: 3954.25,6774.44 3965.9,6768.45 3972.97,6775.52 3966.98,6787.18
  region net RGB4: 4580.99,5757.06 4585,5744.59 4595,5744.59 4599.01,5757.06
  region net +3.3V: 5590.99,3937.06 5595,3924.59 5605,3924.59 5609.01,3937.06
  region net RESET: 4454.01,3942.94 4450,3955.41 4440,3955.41 4435.99,3942.94
  region net M3: 6324.25,4188.02 6335.9,4182.03 6342.97,4189.1 6336.98,4200.75
  region net M1B: 5891.98,4009.25 5897.97,4020.9 5890.9,4027.97 5879.25,4021.98
  region net +5V: 6632.94,4020.99 6645.41,4025 6645.41,4035 6632.94,4039.01
  region net K3: 3825.99,3702.06 3830,3689.59 3840,3689.59 3844.01,3702.06
  region net K3: 3844.01,3432.94 3840,3445.41 3830,3445.41 3825.99,3432.94
  region net K4: 3860.99,3702.06 3865,3689.59 3875,3689.59 3879.01,3702.06
  region net K4: 3879.01,3337.94 3875,3350.41 3865,3350.41 3860.99,3337.94
  region net K2: 4948.02,3685.75 4942.03,3674.1 4949.1,3667.03 4960.75,3673.02
  region net K2: 3944.01,3507.94 3940,3520.41 3930,3520.41 3925.99,3507.94
  region net K1: 3895.99,3702.06 3900,3689.59 3910,3689.59 3914.01,3702.06
  region net K1: 3914.01,3577.94 3910,3590.41 3900,3590.41 3895.99,3577.94
  region net +5V: 5527.06,3859.01 5514.59,3855 5514.59,3845 5527.06,3840.99
  region net TFT_CS: 4983.02,3685.75 4977.03,3674.1 4984.1,3667.03 4995.75,3673.02
  region net TFT_SCLK: 5118.02,3685.75 5112.03,3674.1 5119.1,3667.03 5130.75,3673.02
  region net TOUCH_CS: 5069.01,4587.94 5065,4600.41 5055,4600.41 5050.99,4587.94
  region net TFT_LED: 5705.99,4242.06 5710,4229.59 5720,4229.59 5724.01,4242.06
  region net GND: 5018.02,4815.75 5012.03,4804.1 5019.1,4797.03 5030.75,4803.02
  region net GND: 5510.99,4142.06 5515,4129.59 5525,4129.59 5529.01,4142.06
  region net GND: 5527.4,4159.45 5522.81,4171.28 5512.81,4169.43 5509.7,4156.16
  region net GND: 5506.98,4064.25 5512.97,4075.9 5505.9,4082.97 5494.25,4076.98
  region net RGB2: 5867.94,5035.99 5880.41,5040 5880.41,5050 5867.94,5054.01
  region net RGB1: 5867.94,5085.99 5880.41,5090 5880.41,5100 5867.94,5104.01
  region net GND: 6917.94,4950.99 6930.41,4955 6930.41,4965 6917.94,4969.01
  region net MAG: 6336.98,4249.25 6342.97,4260.9 6335.9,4267.97 6324.25,4261.98
  region net M1A: 5891.98,4059.25 5897.97,4070.9 5890.9,4077.97 5879.25,4071.98
  region net M2B: 5949.01,4167.94 5945,4180.41 5935,4180.41 5930.99,4167.94
  region net M2A: 5904.01,4167.94 5900,4180.41 5890,4180.41 5885.99,4167.94
  region net GND: 5512.19,5706.67 5500.61,5711.46 5495.72,5702.21 5503.77,5690.75
  region net GND: 5505.99,5687.06 5510,5674.59 5520,5674.59 5524.01,5687.06
  region net RTC_SDA: 5220.99,5312.06 5225,5299.59 5235,5299.59 5239.01,5312.06
  region net RTC_SCL: 5155.99,5257.06 5160,5244.59 5170,5244.59 5174.01,5257.06
  region net +12V: 4702.94,5870.99 4715.41,5875 4715.41,5885 4702.94,5889.01
  region net GND12V: 6554.01,5517.94 6550,5530.41 6540,5530.41 6535.99,5517.94
  region net B1: 4937.94,3805.99 4950.41,3810 4950.41,3820 4937.94,3824.01
  region net B1: 5527.06,3824.01 5514.59,3820 5514.59,3810 5527.06,3805.99
  region net +3.3V: 5277.06,5849.01 5264.59,5845 5264.59,5835 5277.06,5830.99
  region net RGB3: 4902.94,3885.99 4915.41,3890 4915.41,3900 4902.94,3904.01
  region net RGB3: 5527.06,3904.01 5514.59,3900 5514.59,3890 5527.06,3885.99
  region net RGB3: 6632.94,4080.99 6645.41,4085 6645.41,4095 6632.94,4099.01
  region net RGB3: 7328.02,4580.75 7322.03,4569.1 7329.1,4562.03 7340.75,4568.02
  region net I2S_LRC: 4332.06,4704.01 4319.59,4700 4319.59,4690 4332.06,4685.99
  region net I2S_BLCK: 4332.06,4604.01 4319.59,4600 4319.59,4590 4332.06,4585.99
  region net I2S_DIN: 4332.06,4404.01 4319.59,4400 4319.59,4390 4332.06,4385.99
  region net +6V: 6375.99,4462.06 6380,4449.59 6390,4449.59 6394.01,4462.06
  region net GND6V: 6425.99,4402.06 6430,4389.59 6440,4389.59 6444.01,4402.06

## Silkscreen, mask and mechanical layers (free items; w line width, h text height)
Top Silkscreen Layer:
  text "Copyright 2021 zixiao_bios." at 6435.85,3102.76 h51.92
  text "2021/12/23" at 7287.25,3031.1 h32.45
Mechanical Layer:
  circle w1 net "": c6143.5,5925 r63
  circle w1 net "": c4175,3956.5 r63
  circle w1 net "": c6143.5,3956.5 r63
  circle w1 net "": c4175,5925 r63

## Text inside footprints (layer, text, board x,y; h text height)
H2: Top Silkscreen Layer "I2S" at 3472.76,4049.43 h51.92 r270; Top Silkscreen Layer "I2S" at 3430.57,4372.76 h51.92
KEYPAD: Top Silkscreen Layer "K1" at 3337.76,3407.15 h51.92 r270; Top Silkscreen Layer "K2" at 3416.51,3414.55 h51.92 r270; Top Silkscreen Layer "K3" at 3495.26,3414.55 h51.92 r270; Top Silkscreen Layer "K4" at 3574.01,3416.85 h51.92 r270; Top Silkscreen Layer "GND" at 3652.76,3469.43 h51.92 r270
M3: Top Silkscreen Layer "+12V" at 7148.34,4052.98 h51.92; Top Silkscreen Layer "M3_O" at 7128.34,3957.98 h51.92
P5: Top Silkscreen Layer "RTC" at 6075.57,6577.76 h51.92; Top Silkscreen Layer "RTC" at 6892.76,6679.43 h51.92 r270
POWER: Top Silkscreen Layer "+5V" at 3482.76,6600.86 h51.92 r270; Top Silkscreen Layer "COM" at 3622.76,6600.86 h51.92 r270; Top Silkscreen Layer "COM" at 3782.76,6600.86 h51.92 r270; Top Silkscreen Layer "+12V" at 3937.76,6603.14 h51.92 r270
RGB1: Top Silkscreen Layer "5V" at 7220.33,5596.21 h51.92; Top Silkscreen Layer "RGB" at 7176.38,5517.64 h51.92; Top Silkscreen Layer "GND" at 7179.95,5430.74 h51.92
RGB2: Top Silkscreen Layer "5V" at 7220.33,5091.21 h51.92; Top Silkscreen Layer "RGB" at 7176.38,5012.64 h51.92; Top Silkscreen Layer "GND" at 7179.95,4925.74 h51.92
RGB3: Top Silkscreen Layer "5V" at 7220.33,4586.21 h51.92; Top Silkscreen Layer "RGB" at 7176.38,4507.64 h51.92; Top Silkscreen Layer "GND" at 7179.95,4420.74 h51.92
SCREEN: Top Silkscreen Layer "+5V" at 4118.51,3444.66 h51.92 r270
TOP1: Top Silkscreen Layer "MAG" at 4887.76,6613.76 h51.92 r270; Top Silkscreen Layer "M1B" at 4807.76,6613.76 h51.92 r270; Top Silkscreen Layer "M1A" at 4727.76,6613.76 h51.92 r270; Top Silkscreen Layer "M2B" at 4647.76,6613.76 h51.92 r270; Top Silkscreen Layer "M2A" at 4567.76,6613.76 h51.92 r270; Top Silkscreen Layer "+12V" at 4487.76,6616.04 h51.92 r270; Top Silkscreen Layer "+5V" at 4887.76,7048.76 h51.92 r270; Top Silkscreen Layer "GND" at 4808.76,7037.56 h51.92 r270; Top Silkscreen Layer "RGB" at 4729.76,7037.56 h51.92 r270; Top Silkscreen Layer "S1" at 4650.76,6962.48 h51.92 r270; Top Silkscreen Layer "S2" at 4571.76,6982.68 h51.92 r270; Top Silkscreen Layer "S3" at 4492.76,6982.68 h51.92 r270
U1: Top Silkscreen Layer "NODEMCU-32" at 4917.76,5180.39 h51.92 r270; Top Silkscreen Layer "NODEMCU-32" at 4679.61,6047.76 h51.92; Top Silkscreen Layer "USB" at 4875.57,3972.76 h51.92
U16: Top Silkscreen Layer "MOTOR DRIVER" at 5962.76,5344.95 h51.92 r270; Top Silkscreen Layer "MOTOR DRIVER" at 5685.05,5602.76 h51.92
U17: Top Silkscreen Layer "DC-DC" at 3467.76,5543.99 h51.92 r270; Top Silkscreen Layer "DC-DC" at 3366.01,6282.76 h51.92
U18: Top Silkscreen Layer "MOS" at 6722.76,5409.66 h51.92 r270; Top Silkscreen Layer "MOS" at 6665.57,5972.98 h51.92
U19: Top Silkscreen Layer "MOS" at 6722.76,3949.66 h51.92 r270; Top Silkscreen Layer "MOS" at 6665.57,4512.98 h51.92